# EAGLE board Raincenter_APP-TS_ARM_combined_EUROPLATINE (EAGLE 6.6.0)
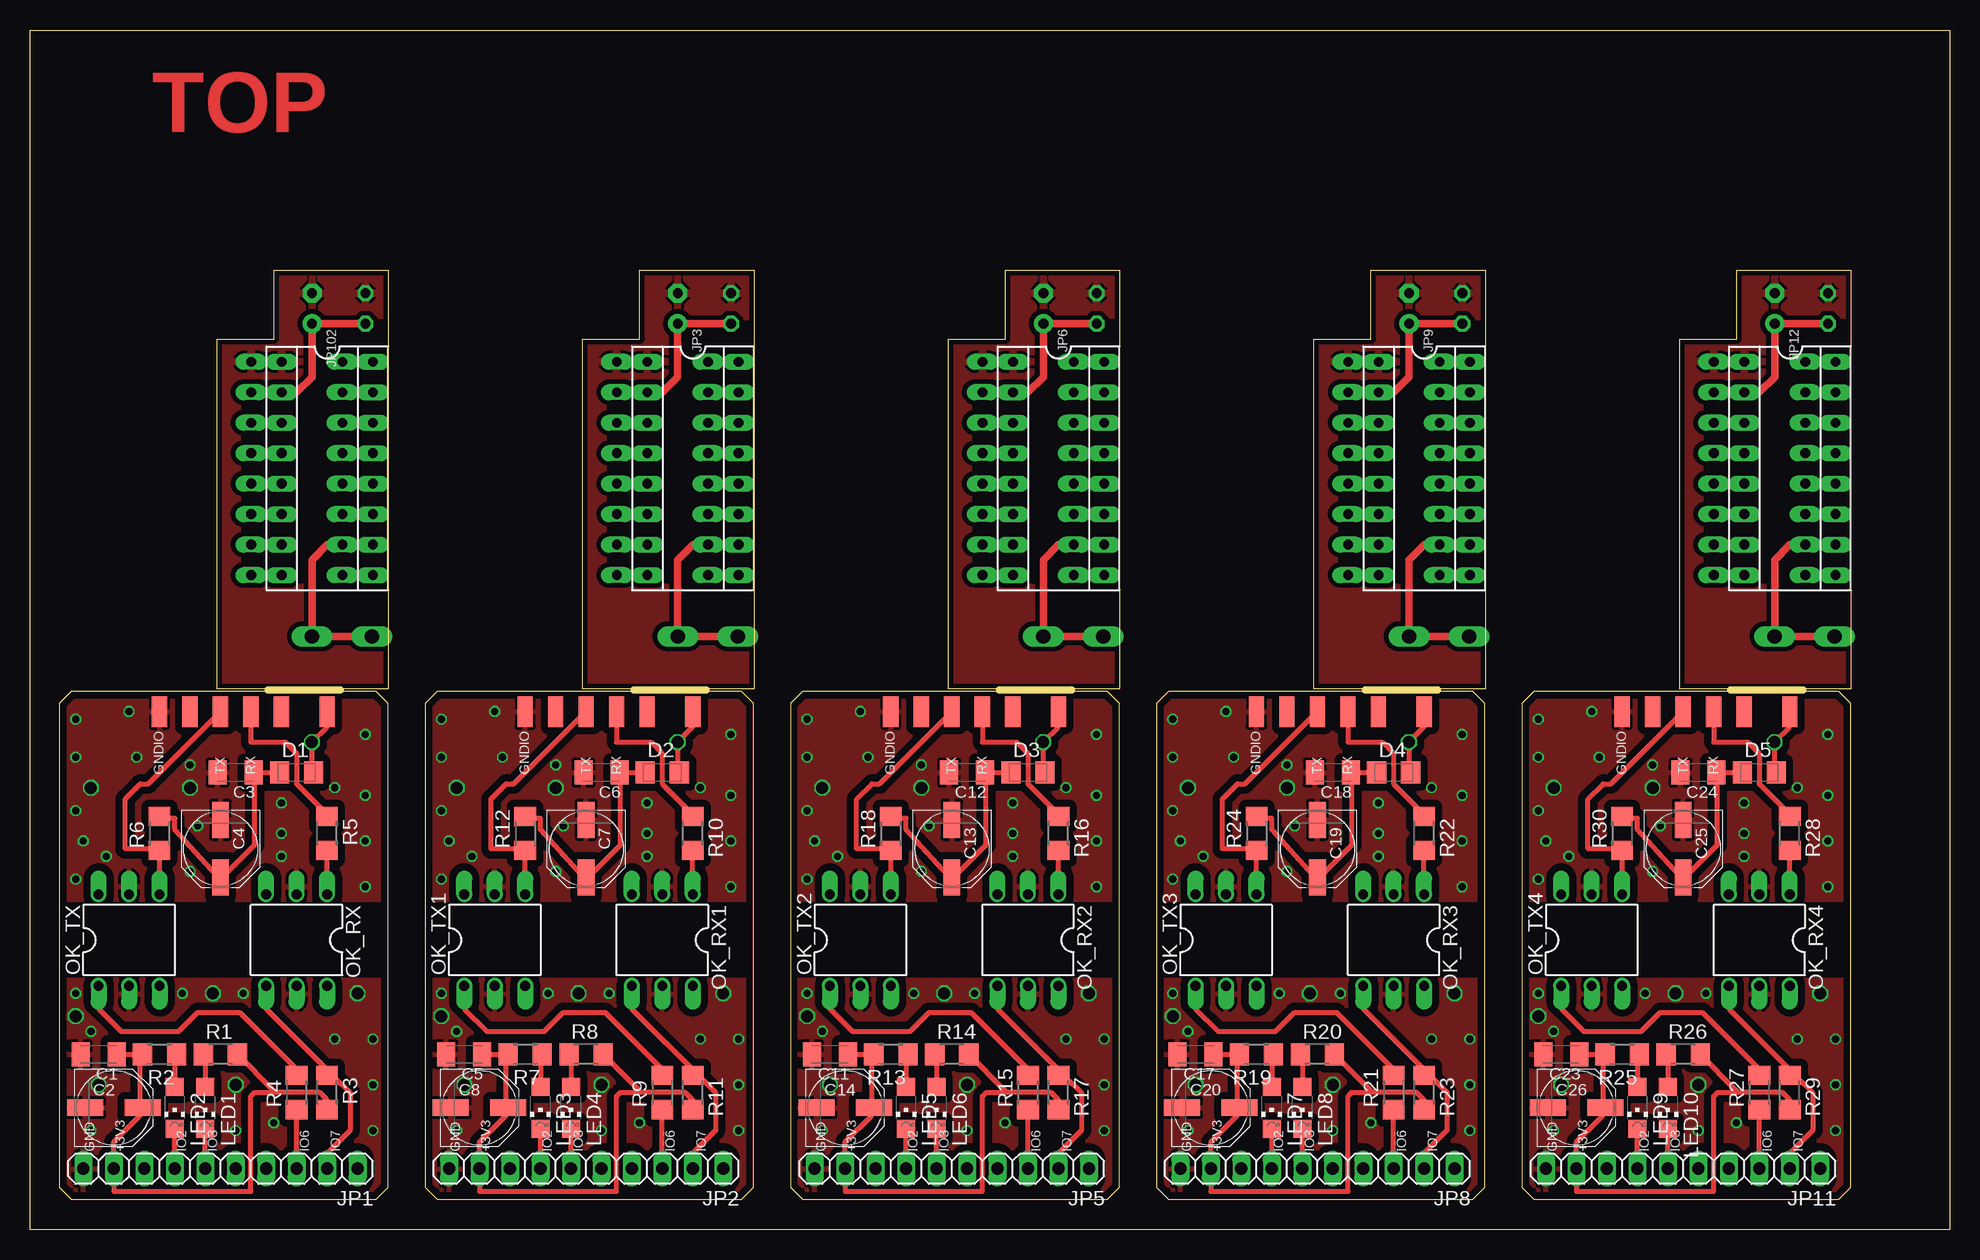
[diagram p0: board, top side]
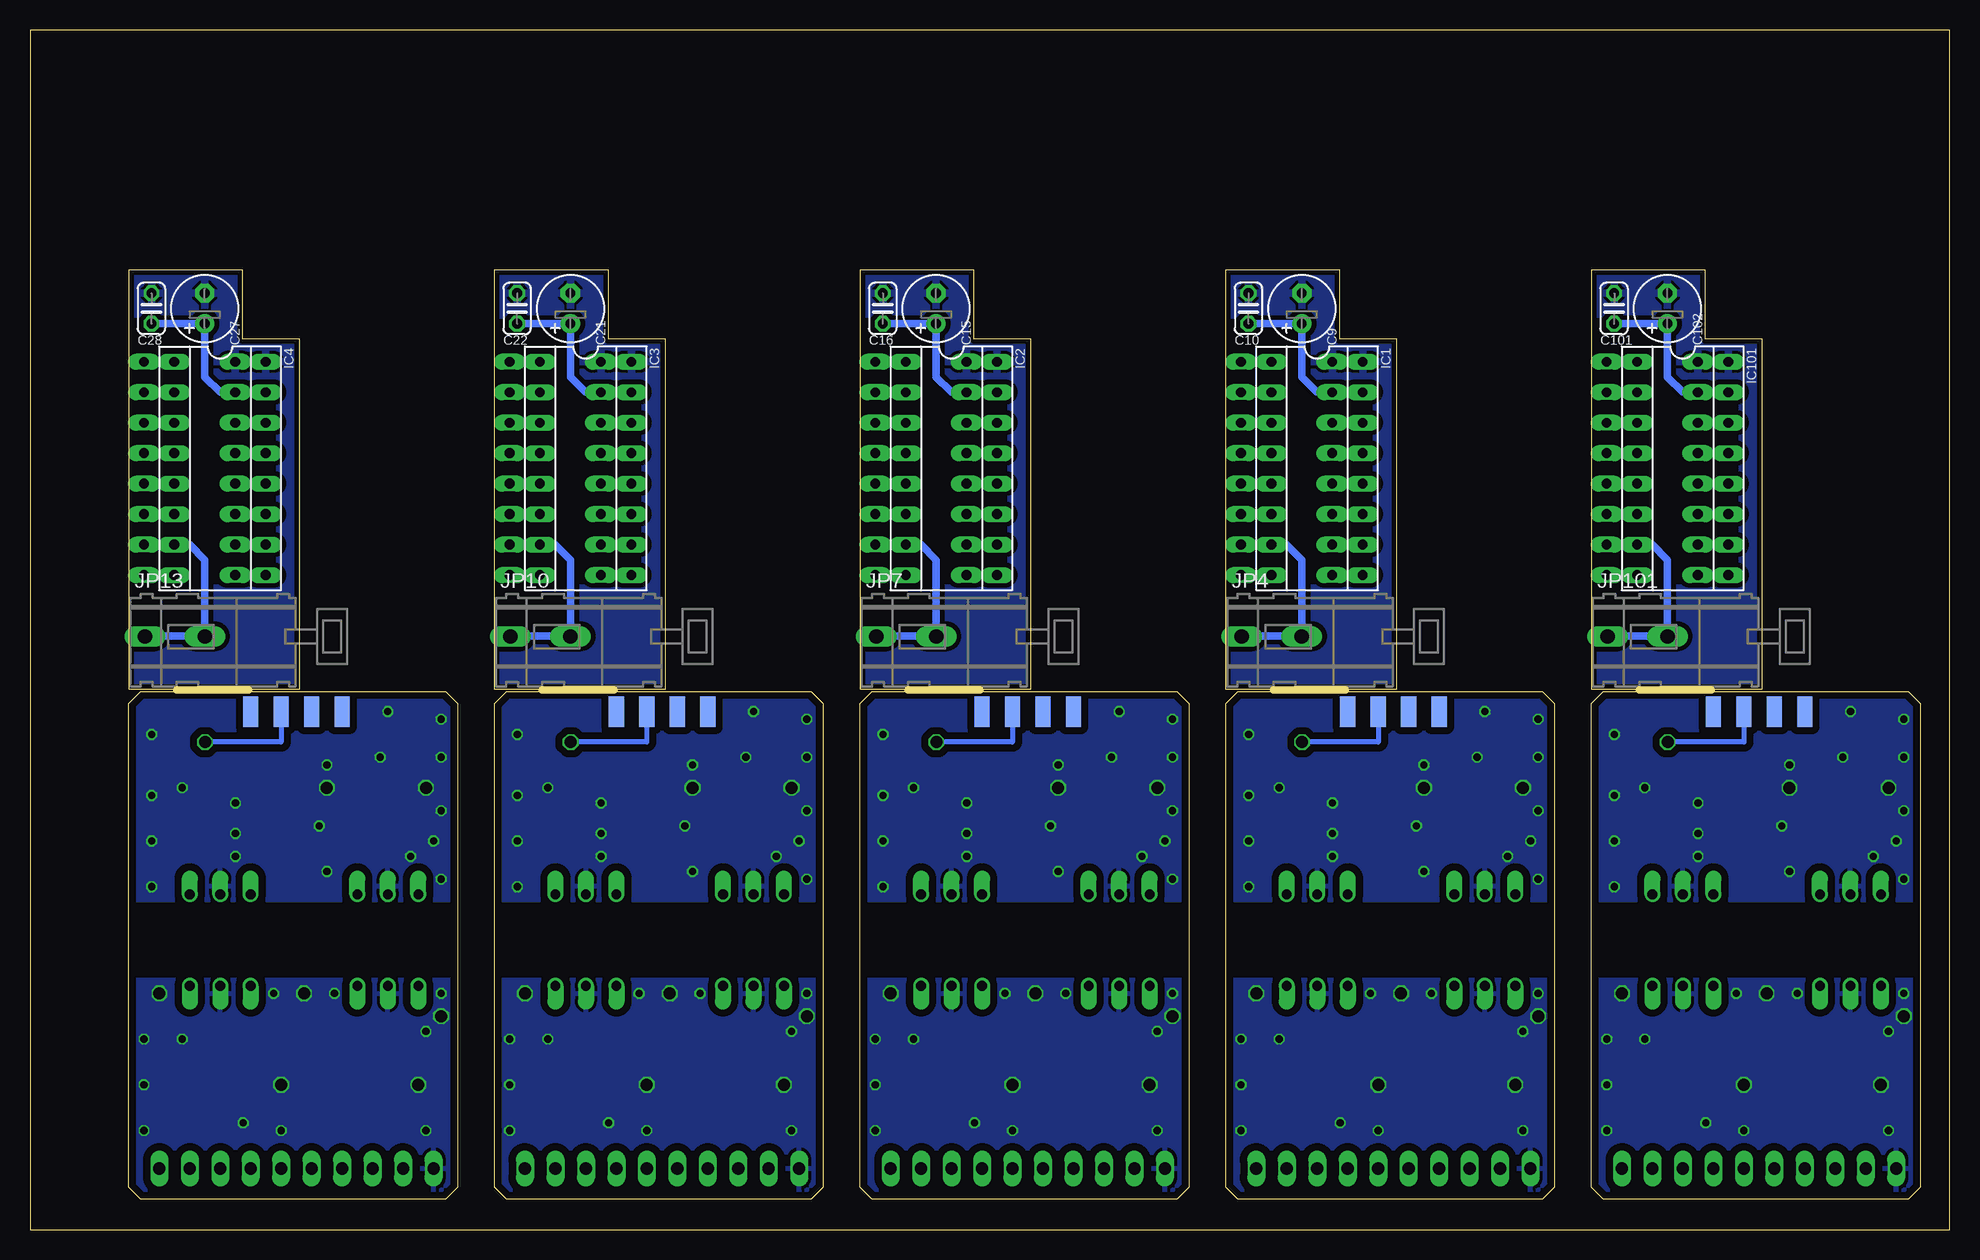
[diagram p1: board, bottom side, seen from below]

Size 160 x 100 mm. Coordinates in mm from the lower left corner, seen from the top.
Outline: 0,0 0,100 160,100 160,0 0,0
Outline: 28.84,2.54 29.84,3.54 29.84,43.84 28.84,44.84 3.44,44.84 2.44,43.84 2.44,3.54 3.44,2.54 28.84,2.54
Outline: 29.86,79.96 29.86,45.05 15.59,45.05 15.59,74.25 20.34,74.25 20.34,79.96 29.86,79.96
Outline: 59.33,2.54 60.33,3.54 60.33,43.84 59.33,44.84 33.92,44.84 32.92,43.84 32.92,3.54 33.92,2.54 59.33,2.54
Outline: 60.34,79.96 60.34,45.05 46.06,45.05 46.06,74.25 50.81,74.25 50.81,79.96 60.34,79.96
Outline: 89.81,2.54 90.81,3.54 90.81,43.84 89.81,44.84 64.41,44.84 63.41,43.84 63.41,3.54 64.41,2.54 89.81,2.54
Outline: 90.82,79.96 90.82,45.05 76.55,45.05 76.55,74.25 81.3,74.25 81.3,79.96 90.82,79.96
Outline: 120.28,2.54 121.28,3.54 121.28,43.84 120.28,44.84 94.89,44.84 93.89,43.84 93.89,3.54 94.89,2.54 120.28,2.54
Outline: 121.3,79.96 121.3,45.05 107.03,45.05 107.03,74.25 111.78,74.25 111.78,79.96 121.3,79.96
Outline: 150.76,2.54 151.76,3.54 151.76,43.84 150.76,44.84 125.36,44.84 124.36,43.84 124.36,3.54 125.36,2.54 150.76,2.54
Outline: 151.78,79.96 151.78,45.05 137.5,45.05 137.5,74.25 142.25,74.25 142.25,79.96 151.78,79.96
Copper layers (1*16): Top 0.035mm / dielectric 1.5mm / Bottom 0.035mm
Design rules "aisler_2_layer *": minimum track width 0.1mm, minimum drill 0.2mm, track to track 0.1mm, track to pad 0.1mm, pad to pad 0.1mm, via to via 0.1mm, smd to smd 0.1mm, copper to edge 0.2mm, drill to drill 0.21mm, minimum pad ring 0.25mm, minimum via ring 0.15mm, stop-mask expansion 0mil, vias tented up to drill 0mil, thermal gap 10mil
Net classes: 0 default: width 0.406 mm; 2 VCC: width 0.61 mm
tRestrict: area 1.9,21.6 to 31.1,26.7; area 32.4,21.6 to 61.6,26.7; area 62.9,21.6 to 92.1,26.7; area 93.3,21.6 to 122.6,26.7; area 123.8,21.6 to 153,26.7
bRestrict: area 1.9,21.6 to 31.1,26.7; area 32.4,21.6 to 61.6,26.7; area 62.9,21.6 to 92.1,26.7; area 93.3,21.6 to 122.6,26.7; area 123.8,21.6 to 153,26.7
Milling: 5 lines

## Footprints (pad centres in the part's own frame; a part is rotated, then mirrored left to right if it is on the bottom)
C1206K = smd 1.5 x 2: 1 -1.5,0; 2 1.5,0
PANASONIC_D = smd 3 x 1.4: + 2.4,0; - -2.4,0
E2,5-6 = drill 0.813 pad 1.6: + -1.27,0 | drill 0.813 pad 1.6 octagon: - 1.27,0
C025-024X044 = drill 0.813 octagon: 1 -1.27,0; 2 1.27,0
1206 = smd 1.6 x 1.803: ANODE 1.422,0; KATHODE -1.422,0
SOCKET-16 = drill 0.813 long: 1 -8.89,-3.81; 2 -6.35,-3.81; 3 -3.81,-3.81; 4 -1.27,-3.81; 5 1.27,-3.81; 6 3.81,-3.81; 7 6.35,-3.81; 8 8.89,-3.81; 9 8.89,3.81; 10 6.35,3.81; 11 3.81,3.81; 12 1.27,3.81; 13 -1.27,3.81; 14 -3.81,3.81; 15 -6.35,3.81; 16 -8.89,3.81
1X10 = drill 1.016 long: 1 -11.43,0; 2 -8.89,0; 3 -6.35,0; 4 -3.81,0; 5 -1.27,0; 6 1.27,0; 7 3.81,0; 8 6.35,0; 9 8.89,0; 10 11.43,0
255-401-5 = drill 1.2 long: A1 -2.5,0; B1 -2.5,-5
CHIPLED_1206 = smd 1.5 x 1.5: A 0,-1.75; C 0,1.75
DIL06 = drill 0.813 offset: 1 -2.54,-3.81; 2 0,-3.81; 3 2.54,-3.81; 4 2.54,3.81; 5 0,3.81; 6 -2.54,3.81
SMD1,27-2,54 = smd 1.27 x 2.54: 1 0,0
R1206 = smd 1.6 x 1.803: 1 -1.422,0; 2 1.422,0

## Placement (x,y rotation side)
C1  100nF  [C1206K]  5.71,14.61 180 top
C2  100µF 25V  [PANASONIC_D]  6.99,10.16 0 top
C3  100nF  [C1206K]  17.14,38.1 180 top
C4  100µF 25V  [PANASONIC_D]  15.88,31.75 270 top
C5  100nF  [C1206K]  36.2,14.61 180 top
C6  100nF  [C1206K]  47.62,38.1 180 top
C7  100µF 25V  [PANASONIC_D]  46.35,31.75 270 top
C8  100µF 25V  [PANASONIC_D]  37.47,10.16 0 top
C9  1µF/100V  [E2,5-6]  53.99,76.78 90 bottom
C10  100nF/50V  [C025-024X044]  58.44,76.78 90 bottom
C11  100nF  [C1206K]  66.67,14.61 180 top
C12  100nF  [C1206K]  78.11,38.1 180 top
C13  100µF 25V  [PANASONIC_D]  76.83,31.75 270 top
C14  100µF 25V  [PANASONIC_D]  67.94,10.16 0 top
C15  1µF/100V  [E2,5-6]  84.47,76.78 90 bottom
C16  100nF/50V  [C025-024X044]  88.92,76.78 90 bottom
C17  100nF  [C1206K]  97.16,14.61 180 top
C18  100nF  [C1206K]  108.58,38.1 180 top
C19  100µF 25V  [PANASONIC_D]  107.31,31.75 270 top
C20  100µF 25V  [PANASONIC_D]  98.42,10.16 0 top
C21  1µF/100V  [E2,5-6]  114.95,76.78 90 bottom
C22  100nF/50V  [C025-024X044]  119.39,76.78 90 bottom
C23  100nF  [C1206K]  127.64,14.61 180 top
C24  100nF  [C1206K]  139.06,38.1 180 top
C25  100µF 25V  [PANASONIC_D]  137.79,31.75 270 top
C26  100µF 25V  [PANASONIC_D]  128.91,10.16 0 top
C27  1µF/100V  [E2,5-6]  145.43,76.78 90 bottom
C28  100nF/50V  [C025-024X044]  149.88,76.78 90 bottom
C101  100nF/50V  [C025-024X044]  27.95,76.78 90 bottom
C102  1µF/100V  [E2,5-6]  23.51,76.78 90 bottom
D1  TS4148  [1206]  22.23,38.1 0 top
D2  TS4148  [1206]  52.7,38.1 0 top
D3  TS4148  [1206]  83.19,38.1 0 top
D4  TS4148  [1206]  113.67,38.1 0 top
D5  TS4148  [1206]  144.15,38.1 0 top
IC1  MAX232ECSE  [SOCKET-16]  52.72,63.45 270 bottom
IC2  MAX232ECSE  [SOCKET-16]  83.2,63.45 270 bottom
IC3  MAX232ECSE  [SOCKET-16]  113.68,63.45 270 bottom
IC4  MAX232ECSE  [SOCKET-16]  144.16,63.45 270 bottom
IC101  MAX232ECSE  [SOCKET-16]  22.24,63.45 270 bottom
JP1  TS_ARM  [1X10]  15.88,5.08 180 top
JP2  TS_ARM  [1X10]  46.35,5.08 180 top
JP3  Raincenter  [SOCKET-16]  55.26,63.45 270 top
JP4  256-101  [255-401-5]  53.99,46.94 270 bottom
JP5  TS_ARM  [1X10]  76.83,5.08 180 top
JP6  Raincenter  [SOCKET-16]  85.74,63.45 270 top
JP7  256-101  [255-401-5]  84.47,46.94 270 bottom
JP8  TS_ARM  [1X10]  107.31,5.08 180 top
JP9  Raincenter  [SOCKET-16]  116.22,63.45 270 top
JP10  256-101  [255-401-5]  114.95,46.94 270 bottom
JP11  TS_ARM  [1X10]  137.79,5.08 180 top
JP12  Raincenter  [SOCKET-16]  146.7,63.45 270 top
JP13  256-101  [255-401-5]  145.43,46.94 270 bottom
JP101  256-101  [255-401-5]  23.51,46.94 270 bottom
JP102  Raincenter  [SOCKET-16]  24.78,63.45 270 top
LED1  green  [CHIPLED_1206]  14.61,10.16 180 top
LED2  yellow  [CHIPLED_1206]  12.06,10.16 180 top
LED3  yellow  [CHIPLED_1206]  42.55,10.16 180 top
LED4  green  [CHIPLED_1206]  45.09,10.16 180 top
LED5  yellow  [CHIPLED_1206]  73.03,10.16 180 top
LED6  green  [CHIPLED_1206]  75.56,10.16 180 top
LED7  yellow  [CHIPLED_1206]  103.5,10.16 180 top
LED8  green  [CHIPLED_1206]  106.05,10.16 180 top
LED9  yellow  [CHIPLED_1206]  133.99,10.16 180 top
LED10  green  [CHIPLED_1206]  136.53,10.16 180 top
OK_RX  4N35  [DIL06]  22.23,24.13 180 top
OK_RX1  4N35  [DIL06]  52.7,24.13 180 top
OK_RX2  4N35  [DIL06]  83.19,24.13 180 top
OK_RX3  4N35  [DIL06]  113.67,24.13 180 top
OK_RX4  4N35  [DIL06]  144.15,24.13 180 top
OK_TX  4N35  [DIL06]  8.26,24.13 0 top
OK_TX1  4N35  [DIL06]  38.73,24.13 0 top
OK_TX2  4N35  [DIL06]  69.22,24.13 0 top
OK_TX3  4N35  [DIL06]  99.69,24.13 0 top
OK_TX4  4N35  [DIL06]  130.18,24.13 0 top
PAD1  [SMD1,27-2,54]  20.95,43.18 180 top
PAD2  RX  [SMD1,27-2,54]  18.41,43.18 180 top
PAD3  TX  [SMD1,27-2,54]  15.88,43.18 180 top
PAD4  [SMD1,27-2,54]  13.34,43.18 180 top
PAD5  GNDIO  [SMD1,27-2,54]  10.79,43.18 180 top
PAD6  [SMD1,27-2,54]  19.68,43.18 0 bottom
PAD7  RTS  [SMD1,27-2,54]  17.14,43.18 0 bottom
PAD8  [SMD1,27-2,54]  14.61,43.18 0 bottom
PAD9  [SMD1,27-2,54]  12.06,43.18 0 bottom
PAD10  RTS  [SMD1,27-2,54]  24.77,43.18 180 top
PAD11  [SMD1,27-2,54]  51.44,43.18 180 top
PAD12  RX  [SMD1,27-2,54]  48.9,43.18 180 top
PAD13  TX  [SMD1,27-2,54]  46.35,43.18 180 top
PAD14  [SMD1,27-2,54]  43.81,43.18 180 top
PAD15  GNDIO  [SMD1,27-2,54]  41.27,43.18 180 top
PAD16  [SMD1,27-2,54]  50.16,43.18 0 bottom
PAD17  RTS  [SMD1,27-2,54]  47.62,43.18 0 bottom
PAD18  [SMD1,27-2,54]  45.09,43.18 0 bottom
PAD19  [SMD1,27-2,54]  42.55,43.18 0 bottom
PAD20  RTS  [SMD1,27-2,54]  55.24,43.18 180 top
PAD21  [SMD1,27-2,54]  81.92,43.18 180 top
PAD22  RX  [SMD1,27-2,54]  79.38,43.18 180 top
PAD23  TX  [SMD1,27-2,54]  76.83,43.18 180 top
PAD24  [SMD1,27-2,54]  74.3,43.18 180 top
PAD25  GNDIO  [SMD1,27-2,54]  71.75,43.18 180 top
PAD26  [SMD1,27-2,54]  80.64,43.18 0 bottom
PAD27  RTS  [SMD1,27-2,54]  78.11,43.18 0 bottom
PAD28  [SMD1,27-2,54]  75.56,43.18 0 bottom
PAD29  [SMD1,27-2,54]  73.03,43.18 0 bottom
PAD30  RTS  [SMD1,27-2,54]  85.72,43.18 180 top
PAD31  [SMD1,27-2,54]  112.39,43.18 180 top
PAD32  RX  [SMD1,27-2,54]  109.86,43.18 180 top
PAD33  TX  [SMD1,27-2,54]  107.31,43.18 180 top
PAD34  [SMD1,27-2,54]  104.78,43.18 180 top
PAD35  GNDIO  [SMD1,27-2,54]  102.23,43.18 180 top
PAD36  [SMD1,27-2,54]  111.12,43.18 0 bottom
PAD37  RTS  [SMD1,27-2,54]  108.58,43.18 0 bottom
PAD38  [SMD1,27-2,54]  106.05,43.18 0 bottom
PAD39  [SMD1,27-2,54]  103.5,43.18 0 bottom
PAD40  RTS  [SMD1,27-2,54]  116.2,43.18 180 top
PAD41  [SMD1,27-2,54]  142.88,43.18 180 top
PAD42  RX  [SMD1,27-2,54]  140.34,43.18 180 top
PAD43  TX  [SMD1,27-2,54]  137.79,43.18 180 top
PAD44  [SMD1,27-2,54]  135.25,43.18 180 top
PAD45  GNDIO  [SMD1,27-2,54]  132.72,43.18 180 top
PAD46  [SMD1,27-2,54]  141.6,43.18 0 bottom
PAD47  RTS  [SMD1,27-2,54]  139.06,43.18 0 bottom
PAD48  [SMD1,27-2,54]  136.53,43.18 0 bottom
PAD49  [SMD1,27-2,54]  133.99,43.18 0 bottom
PAD50  RTS  [SMD1,27-2,54]  146.69,43.18 180 top
R1  1K0  [R1206]  15.88,14.61 0 top
R2  1K0  [R1206]  10.79,14.61 180 top
R3  4K7  [R1206]  24.77,11.43 270 top
R4  470R0  [R1206]  22.23,11.43 90 top
R5  470R0  [R1206]  24.77,33.02 270 top
R6  2K2  [R1206]  10.79,33.02 90 top
R7  1K0  [R1206]  41.27,14.61 180 top
R8  1K0  [R1206]  46.35,14.61 0 top
R9  470R0  [R1206]  52.7,11.43 90 top
R10  470R0  [R1206]  55.24,33.02 270 top
R11  4K7  [R1206]  55.24,11.43 270 top
R12  2K2  [R1206]  41.27,33.02 90 top
R13  1K0  [R1206]  71.75,14.61 180 top
R14  1K0  [R1206]  76.83,14.61 0 top
R15  470R0  [R1206]  83.19,11.43 90 top
R16  470R0  [R1206]  85.72,33.02 270 top
R17  4K7  [R1206]  85.72,11.43 270 top
R18  2K2  [R1206]  71.75,33.02 90 top
R19  1K0  [R1206]  102.23,14.61 180 top
R20  1K0  [R1206]  107.31,14.61 0 top
R21  470R0  [R1206]  113.67,11.43 90 top
R22  470R0  [R1206]  116.2,33.02 270 top
R23  4K7  [R1206]  116.2,11.43 270 top
R24  2K2  [R1206]  102.23,33.02 90 top
R25  1K0  [R1206]  132.72,14.61 180 top
R26  1K0  [R1206]  137.79,14.61 0 top
R27  470R0  [R1206]  144.15,11.43 90 top
R28  470R0  [R1206]  146.69,33.02 270 top
R29  4K7  [R1206]  146.69,11.43 270 top
R30  2K2  [R1206]  132.72,33.02 90 top

## Library data of the parts
C1 C3 C5 C6 C11 C12 C17 C18 C23 C24 = rcl
C2 C4 C7 C8 C13 C14 C19 C20 C25 C26 = rcl; OC_REICHELT: VF 100/25 P-D8
C9 C15 C21 C27 C102 = rcl; REICHELT: RAD 105 1,0/100
C10 C16 C22 C28 C101 = rcl; MN: Murata; REICHELT: X7R-2,5 100N
D1-D5 = kubi
IC1-IC4 IC101 = ic-package; REICHELT: GS 16P
JP1 JP2 JP5 JP8 JP11 = pinhead
JP3 JP6 JP9 JP12 JP102 = ic-package; MF: ASSMANN; MPN: AR-16-ST/T; REICHELT: AR 16
JP4 JP7 JP10 JP13 JP101 = Klemmen; CONRAD: 1x730366 + 1x730378; MN: WAGO; MPN: 1x 256-101 + 1x 256-100
LED1 LED4 LED6 LED8 LED10 = led; REICHELT: SMD-LED 1206 GN
LED2 LED3 LED5 LED7 LED9 = led; REICHELT: SMD-LED 1206 GE
OK_RX OK_RX1-OK_RX4 OK_TX OK_TX1-OK_TX4 = optocoupler; MF: FAIRCHILD SEMICONDUCTOR; MPN: 4N35; OC_FARNELL: 1328375; OC_NEWARK: 72K9946
PAD1-PAD50 = wirepad
R1 R2 R7 R8 R13 R14 R19 R20 R25 R26 = rcl; REICHELT: RND 1206 1 1,0K
R3 R11 R17 R23 R29 = rcl; REICHELT: RND 1206 1 4,7K
R4 R5 R9 R10 R15 R16 R21 R22 R27 R28 = rcl; REICHELT: RND 1206 1 470
R6 R12 R18 R24 R30 = rcl; REICHELT: RND 1206 1 3,9K

## Nets
+3V1: C5.1 C8.+ JP2.9 R7.2 R8.2 R11.2
+3V2: C11.1 C14.+ JP5.9 R13.2 R14.2 R17.2
+3V3: C1.1 C2.+ JP1.9 R1.2 R2.2 R3.2
+3V4: C17.1 C20.+ JP8.9 R19.2 R20.2 R23.2
+3V5: C23.1 C26.+ JP11.9 R25.2 R26.2 R29.2
+5V: C101.1 C102.+ IC101.15 JP102.2
+5V1: C9.+ C10.1 IC1.15 JP3.2
+5V2: C15.+ C16.1 IC2.15 JP6.2
+5V3: C21.+ C22.1 IC3.15 JP9.2
+5V4: C27.+ C28.1 IC4.15 JP12.2
GND: C1.2 C2.- JP1.10 OK_RX.5 OK_TX.2
GND1: C5.2 C8.- JP2.10 OK_RX1.5 OK_TX1.2
GND2: C11.2 C14.- JP5.10 OK_RX2.5 OK_TX2.2
GND3: C17.2 C20.- JP8.10 OK_RX3.5 OK_TX3.2
GND4: C23.2 C26.- JP11.10 OK_RX4.5 OK_TX4.2
GNDINT: C101.2 C102.- IC101.16 JP102.1
GNDINT1: C9.- C10.2 IC1.16 JP3.1
GNDINT2: C15.- C16.2 IC2.16 JP6.1
GNDINT3: C21.- C22.2 IC3.16 JP9.1
GNDINT4: C27.- C28.2 IC4.16 JP12.1
GNDIO: C3.2 C4.- OK_RX.2 OK_TX.5 PAD5.1
GNDIO1: C6.2 C7.- OK_RX1.2 OK_TX1.5 PAD15.1
GNDIO2: C12.2 C13.- OK_RX2.2 OK_TX2.5 PAD25.1
GNDIO3: C18.2 C19.- OK_RX3.2 OK_TX3.5 PAD35.1
GNDIO4: C24.2 C25.- OK_RX4.2 OK_TX4.5 PAD45.1
IO1: JP2.7 LED3.C
IO2: JP1.7 LED2.C
IO3: JP1.6 LED1.C
IO4: JP2.6 LED4.C
IO5: JP2.3 R9.1
IO6: JP1.3 R4.1
IO7: JP1.2 OK_RX.4 R3.1
IO8: JP2.2 OK_RX1.4 R11.1
IO9: JP5.7 LED5.C
IO10: JP5.6 LED6.C
IO11: JP5.3 R15.1
IO12: JP5.2 OK_RX2.4 R17.1
IO13: JP8.7 LED7.C
IO14: JP8.6 LED8.C
IO15: JP8.3 R21.1
IO16: JP8.2 OK_RX3.4 R23.1
IO17: JP11.7 LED9.C
IO18: JP11.6 LED10.C
IO19: JP11.3 R27.1
IO20: JP11.2 OK_RX4.4 R29.1
N$1: LED3.A R7.1
N$2: LED4.A R8.1
N$3: OK_RX1.1 R10.2
N$4: OK_TX1.1 R9.2
N$5: LED2.A R2.1
N$6: LED5.A R13.1
N$7: LED6.A R14.1
N$8: OK_RX.1 R5.2
N$9: OK_RX2.1 R16.2
N$10: OK_TX.1 R4.2
N$11: LED1.A R1.1
N$12: OK_TX2.1 R15.2
N$13: LED7.A R19.1
N$14: LED8.A R20.1
N$15: OK_RX3.1 R22.2
N$16: OK_TX3.1 R21.2
N$17: LED9.A R25.1
N$18: LED10.A R26.1
N$19: OK_RX4.1 R28.2
N$20: OK_TX4.1 R27.2
P1: IC101.1 JP102.16
P2: IC101.2 JP102.15
P3: IC101.3 JP102.14
P4: IC101.4 JP102.13
P5: IC101.5 JP102.12
P6: IC101.6 JP102.11
P7: IC1.1 JP3.16
P7_RTS: IC101.7 JP101.A1 JP101.B1 JP102.10
P7_RTS1: IC1.7 JP3.10 JP4.A1 JP4.B1
P7_RTS2: IC2.7 JP6.10 JP7.A1 JP7.B1
P7_RTS3: IC3.7 JP9.10 JP10.A1 JP10.B1
P7_RTS4: IC4.7 JP12.10 JP13.A1 JP13.B1
P8: IC101.8 JP102.9
P9: IC101.9 JP102.8
P10: IC101.10 JP102.7
P11: IC101.11 JP102.6
P12: IC101.12 JP102.5
P13: IC101.13 JP102.4
P14: IC101.14 JP102.3
P15: IC1.2 JP3.15
P16: IC1.3 JP3.14
P17: IC1.4 JP3.13
P18: IC1.5 JP3.12
P19: IC1.6 JP3.11
P20: IC1.8 JP3.9
P21: IC1.9 JP3.8
P22: IC1.10 JP3.7
P23: IC1.11 JP3.6
P24: IC1.12 JP3.5
P25: IC1.13 JP3.4
P26: IC1.14 JP3.3
P27: IC2.1 JP6.16
P28: IC2.2 JP6.15
P29: IC2.3 JP6.14
P30: IC2.4 JP6.13
P31: IC2.5 JP6.12
P32: IC2.6 JP6.11
P33: IC2.8 JP6.9
P34: IC2.9 JP6.8
P35: IC2.10 JP6.7
P36: IC2.11 JP6.6
P37: IC2.12 JP6.5
P38: IC2.13 JP6.4
P39: IC2.14 JP6.3
P40: IC3.1 JP9.16
P41: IC3.2 JP9.15
P42: IC3.3 JP9.14
P43: IC3.4 JP9.13
P44: IC3.5 JP9.12
P45: IC3.6 JP9.11
P46: IC3.8 JP9.9
P47: IC3.9 JP9.8
P48: IC3.10 JP9.7
P49: IC3.11 JP9.6
P50: IC3.12 JP9.5
P51: IC3.13 JP9.4
P52: IC3.14 JP9.3
P53: IC4.1 JP12.16
P54: IC4.2 JP12.15
P55: IC4.3 JP12.14
P56: IC4.4 JP12.13
P57: IC4.5 JP12.12
P58: IC4.6 JP12.11
P59: IC4.8 JP12.9
P60: IC4.9 JP12.8
P61: IC4.10 JP12.7
P62: IC4.11 JP12.6
P63: IC4.12 JP12.5
P64: IC4.13 JP12.4
P65: IC4.14 JP12.3
RC_RTS: D1.ANODE PAD7.1 PAD10.1
RC_RTS1: D2.ANODE PAD17.1 PAD20.1
RC_RTS2: D3.ANODE PAD27.1 PAD30.1
RC_RTS3: D4.ANODE PAD37.1 PAD40.1
RC_RTS4: D5.ANODE PAD47.1 PAD50.1
RC_RX: PAD2.1 R5.1
RC_RX1: PAD12.1 R10.1
RC_RX2: PAD22.1 R16.1
RC_RX3: PAD32.1 R22.1
RC_RX4: PAD42.1 R28.1
RX_TX: OK_TX.4 PAD3.1 R6.1
RX_TX1: OK_TX1.4 PAD13.1 R12.1
RX_TX2: OK_TX2.4 PAD23.1 R18.1
RX_TX3: OK_TX3.4 PAD33.1 R24.1
RX_TX4: OK_TX4.4 PAD43.1 R30.1
V+: C3.1 C4.+ D1.KATHODE R6.2
V+1: C6.1 C7.+ D2.KATHODE R12.2
V+2: C12.1 C13.+ D3.KATHODE R18.2
V+3: C18.1 C19.+ D4.KATHODE R24.2
V+4: C24.1 C25.+ D5.KATHODE R30.2

## Tracks (layer width: path | path; a pad name or v marks a point on that pad's centre or on a via)
+3V1
  Top 0.406: 47.94,15.24 R8.2 50.8,11.58 50.8,11.43 | C5.1 39.69,14.61 | 39.69,10.16 39.69,14.61 | 39.69,14.61 R7.2 | 39.69,10.16 39.05,10.16 | 39.69,10.16 C8.+ 39.69,9.98 39.69,9.53 37.47,7.3 JP2.9 37.47,3.17 48.9,3.17 48.9,11.11 49.21,11.43 50.8,11.43 | R11.2 55.24,10.79 54.61,11.43 50.8,11.43
+3V2
  Top 0.406: 78.42,15.24 R14.2 81.28,11.58 81.28,11.43 | C11.1 70.17,14.61 | 70.17,10.16 70.17,14.61 | 70.17,14.61 R13.2 | 70.17,10.16 69.53,10.16 | 70.17,10.16 C14.+ 70.17,9.98 70.17,9.53 67.94,7.3 JP5.9 67.94,3.17 79.38,3.17 79.38,11.11 79.69,11.43 81.28,11.43 | R17.2 85.72,10.79 85.09,11.43 81.28,11.43
+3V3
  Top 0.406: 17.46,15.24 R1.2 20.32,11.58 20.32,11.43 | C1.1 9.21,14.61 | 9.21,10.16 9.21,14.61 | 9.21,14.61 R2.2 | 9.21,10.16 8.57,10.16 | 9.21,10.16 C2.+ 9.21,9.98 9.21,9.53 6.99,7.3 JP1.9 6.99,3.17 18.41,3.17 18.41,11.11 18.73,11.43 20.32,11.43 | R3.2 24.77,10.79 24.13,11.43 20.32,11.43
+3V4
  Top 0.406: 108.9,15.24 R20.2 111.76,11.58 111.76,11.43 | C17.1 100.65,14.61 | 100.65,10.16 100.65,14.61 | 100.65,14.61 R19.2 | 100.65,10.16 100.01,10.16 | 100.65,10.16 C20.+ 100.65,9.98 100.65,9.53 98.42,7.3 JP8.9 98.42,3.17 109.86,3.17 109.86,11.11 110.17,11.43 111.76,11.43 | R23.2 116.2,10.79 115.57,11.43 111.76,11.43
+3V5
  Top 0.406: 139.38,15.24 R26.2 142.24,11.58 142.24,11.43 | C23.1 131.13,14.61 | 131.13,10.16 131.13,14.61 | 131.13,14.61 R25.2 | 131.13,10.16 130.49,10.16 | 131.13,10.16 C26.+ 131.13,9.98 131.13,9.53 128.91,7.3 JP11.9 128.91,3.17 140.34,3.17 140.34,11.11 140.65,11.43 142.24,11.43 | R29.2 146.69,10.79 146.05,11.43 142.24,11.43
+5V
  Top 0.61: IC101.15 JP102.2 22.24,69.8 23.51,71.07 C102.+ C101.1
  Bottom 0.61: C101.1 C102.+ 23.51,71.07 22.24,69.8 JP102.2 IC101.15
+5V1
  Top 0.61: IC1.15 JP3.2 52.72,69.8 53.99,71.07 C9.+ C10.1
  Bottom 0.61: C10.1 C9.+ 53.99,71.07 52.72,69.8 JP3.2 IC1.15
+5V2
  Top 0.61: IC2.15 JP6.2 83.2,69.8 84.47,71.07 C15.+ C16.1
  Bottom 0.61: C16.1 C15.+ 84.47,71.07 83.2,69.8 JP6.2 IC2.15
+5V3
  Top 0.61: IC3.15 JP9.2 113.68,69.8 114.95,71.07 C21.+ C22.1
  Bottom 0.61: C22.1 C21.+ 114.95,71.07 113.68,69.8 JP9.2 IC3.15
+5V4
  Top 0.61: IC4.15 JP12.2 144.16,69.8 145.43,71.07 C27.+ C28.1
  Bottom 0.61: C28.1 C27.+ 145.43,71.07 144.16,69.8 JP12.2 IC4.15
GND  (via drill 0.6, 1)
  other vias: 3.81,17.78 15.24,19.68 27.3,19.68 17.14,12.06 5.71,12.06 28.57,8.26 28.57,12.06 28.57,15.88 25.4,15.88 20.32,8.89 17.14,8.26 17.78,19.68 12.7,19.68 5.08,8.26 5.08,16.51 3.81,19.68
  pour Top (isolate 0.61, rank 2): 1.91,2.54 2.06,22.23 29.69,22.23 29.53,2.54
  pour Bottom (isolate 0.61, rank 2): 1.91,2.54 2.06,22.23 29.69,22.23 29.53,2.54
GND1  (via drill 0.6, 1)
  other vias: 34.29,17.78 45.72,19.68 57.78,19.68 47.62,12.06 36.2,12.06 59.05,8.26 59.05,12.06 59.05,15.88 55.88,15.88 50.8,8.89 47.62,8.26 48.26,19.68 43.18,19.68 35.56,8.26 35.56,16.51 34.29,19.68
  pour Top (isolate 0.61, rank 2): 32.38,2.54 32.54,22.23 60.17,22.23 60.01,2.54
  pour Bottom (isolate 0.61, rank 2): 32.38,2.54 32.54,22.23 60.17,22.23 60.01,2.54
GND2  (via drill 0.6, 1)
  other vias: 64.77,17.78 76.2,19.68 88.27,19.68 78.11,12.06 66.67,12.06 89.53,8.26 89.53,12.06 89.53,15.88 86.36,15.88 81.28,8.89 78.11,8.26 78.74,19.68 73.66,19.68 66.04,8.26 66.04,16.51 64.77,19.68
  pour Top (isolate 0.61, rank 2): 62.87,2.54 63.02,22.23 90.65,22.23 90.49,2.54
  pour Bottom (isolate 0.61, rank 2): 62.87,2.54 63.02,22.23 90.65,22.23 90.49,2.54
GND3  (via drill 0.6, 1)
  other vias: 95.25,17.78 106.68,19.68 118.75,19.68 108.58,12.06 97.16,12.06 120.02,8.26 120.02,12.06 120.02,15.88 116.84,15.88 111.76,8.89 108.58,8.26 109.22,19.68 104.14,19.68 96.52,8.26 96.52,16.51 95.25,19.68
  pour Top (isolate 0.61, rank 2): 93.34,2.54 93.5,22.23 121.13,22.23 120.97,2.54
  pour Bottom (isolate 0.61, rank 2): 93.34,2.54 93.5,22.23 121.13,22.23 120.97,2.54
GND4  (via drill 0.6, 1)
  other vias: 125.73,17.78 137.16,19.68 149.22,19.68 139.06,12.06 127.64,12.06 150.5,8.26 150.5,12.06 150.5,15.88 147.32,15.88 142.24,8.89 139.06,8.26 139.7,19.68 134.62,19.68 127,8.26 127,16.51 125.73,19.68
  pour Top (isolate 0.61, rank 2): 123.83,2.54 123.98,22.23 151.61,22.23 151.45,2.54
  pour Bottom (isolate 0.61, rank 2): 123.83,2.54 123.98,22.23 151.61,22.23 151.45,2.54
GNDINT
  pour Top (isolate 0.406): 29.86,79.96 29.86,45.03 15.26,45.03 15.26,74.25 20.34,74.25 20.34,79.96
  pour Bottom (isolate 0.406): 29.86,79.96 29.86,45.03 15.26,45.03 15.26,74.25 20.34,74.25 20.34,79.96
GNDINT1
  pour Top (isolate 0.406): 60.34,79.96 60.34,45.03 45.73,45.03 45.73,74.25 50.81,74.25 50.81,79.96
  pour Bottom (isolate 0.406): 60.34,79.96 60.34,45.03 45.73,45.03 45.73,74.25 50.81,74.25 50.81,79.96
GNDINT2
  pour Top (isolate 0.406): 90.82,79.96 90.82,45.03 76.22,45.03 76.22,74.25 81.3,74.25 81.3,79.96
  pour Bottom (isolate 0.406): 90.82,79.96 90.82,45.03 76.22,45.03 76.22,74.25 81.3,74.25 81.3,79.96
GNDINT3
  pour Top (isolate 0.406): 121.3,79.96 121.3,45.03 106.69,45.03 106.69,74.25 111.78,74.25 111.78,79.96
  pour Bottom (isolate 0.406): 121.3,79.96 121.3,45.03 106.69,45.03 106.69,74.25 111.78,74.25 111.78,79.96
GNDINT4
  pour Top (isolate 0.406): 151.78,79.96 151.78,45.03 137.18,45.03 137.18,74.25 142.25,74.25 142.25,79.96
  pour Bottom (isolate 0.406): 151.78,79.96 151.78,45.03 137.18,45.03 137.18,74.25 142.25,74.25 142.25,79.96
GNDIO  (via drill 0.6, 1)
  other vias: 13.34,36.83 5.08,36.83 4.45,32.38 3.81,29.21 3.81,34.92 3.81,39.37 3.81,42.55 8.26,43.18 8.89,39.37 6.35,31.11 13.34,29.84 13.97,33.66 13.34,38.73 20.95,35.56 20.95,33.02 20.95,31.11 27.94,28.57 27.94,41.27 25.4,36.83 27.94,36.2 27.94,32.38
  pour Top (isolate 0.61, rank 2): 1.91,26.04 2.06,45.09 29.69,45.09 29.53,26.04
  pour Bottom (isolate 0.61, rank 2): 1.91,26.04 2.06,45.09 29.69,45.09 29.53,26.04
GNDIO1  (via drill 0.6, 1)
  other vias: 43.81,36.83 35.56,36.83 34.92,32.38 34.29,29.21 34.29,34.92 34.29,39.37 34.29,42.55 38.73,43.18 39.37,39.37 36.83,31.11 43.81,29.84 44.45,33.66 43.81,38.73 51.44,35.56 51.44,33.02 51.44,31.11 58.42,28.57 58.42,41.27 55.88,36.83 58.42,36.2 58.42,32.38
  pour Top (isolate 0.61, rank 2): 32.38,26.04 32.54,45.09 60.17,45.09 60.01,26.04
  pour Bottom (isolate 0.61, rank 2): 32.38,26.04 32.54,45.09 60.17,45.09 60.01,26.04
GNDIO2  (via drill 0.6, 1)
  other vias: 74.3,36.83 66.04,36.83 65.41,32.38 64.77,29.21 64.77,34.92 64.77,39.37 64.77,42.55 69.22,43.18 69.85,39.37 67.31,31.11 74.3,29.84 74.93,33.66 74.3,38.73 81.92,35.56 81.92,33.02 81.92,31.11 88.9,28.57 88.9,41.27 86.36,36.83 88.9,36.2 88.9,32.38
  pour Top (isolate 0.61, rank 2): 62.87,26.04 63.02,45.09 90.65,45.09 90.49,26.04
  pour Bottom (isolate 0.61, rank 2): 62.87,26.04 63.02,45.09 90.65,45.09 90.49,26.04
GNDIO3  (via drill 0.6, 1)
  other vias: 104.78,36.83 96.52,36.83 95.89,32.38 95.25,29.21 95.25,34.92 95.25,39.37 95.25,42.55 99.69,43.18 100.33,39.37 97.79,31.11 104.78,29.84 105.41,33.66 104.78,38.73 112.39,35.56 112.39,33.02 112.39,31.11 119.38,28.57 119.38,41.27 116.84,36.83 119.38,36.2 119.38,32.38
  pour Top (isolate 0.61, rank 2): 93.34,26.04 93.5,45.09 121.13,45.09 120.97,26.04
  pour Bottom (isolate 0.61, rank 2): 93.34,26.04 93.5,45.09 121.13,45.09 120.97,26.04
GNDIO4  (via drill 0.6, 1)
  other vias: 135.25,36.83 127,36.83 126.36,32.38 125.73,29.21 125.73,34.92 125.73,39.37 125.73,42.55 130.18,43.18 130.81,39.37 128.27,31.11 135.25,29.84 135.89,33.66 135.25,38.73 142.88,35.56 142.88,33.02 142.88,31.11 149.86,28.57 149.86,41.27 147.32,36.83 149.86,36.2 149.86,32.38
  pour Top (isolate 0.61, rank 2): 123.83,26.04 123.98,45.09 151.61,45.09 151.45,26.04
  pour Bottom (isolate 0.61, rank 2): 123.83,26.04 123.98,45.09 151.61,45.09 151.45,26.04
IO1
  Top 0.406: JP2.7 LED3.C
IO2
  Top 0.406: JP1.7 LED2.C
IO3
  Top 0.406: JP1.6 LED1.C
IO4
  Top 0.406: JP2.6 LED4.C
IO5
  Top 0.406: JP2.3 R9.1
IO6
  Top 0.406: JP1.3 R4.1
IO7
  Top 0.406: OK_RX.4 19.68,18.41 25.4,12.7 | JP1.2 24.77,6.35 26.67,8.26 26.67,11.43 25.4,12.7 | 25.4,12.7 24.77,12.7 R3.1
IO8
  Top 0.406: OK_RX1.4 50.16,18.41 55.88,12.7 | JP2.2 55.24,6.35 57.15,8.26 57.15,11.43 55.88,12.7 | 55.88,12.7 55.24,12.7 R11.1
IO9
  Top 0.406: JP5.7 LED5.C
IO10
  Top 0.406: JP5.6 LED6.C
IO11
  Top 0.406: JP5.3 R15.1
IO12
  Top 0.406: OK_RX2.4 80.64,18.41 86.36,12.7 | JP5.2 85.72,6.35 87.63,8.26 87.63,11.43 86.36,12.7 | 86.36,12.7 85.72,12.7 R17.1
IO13
  Top 0.406: JP8.7 LED7.C
IO14
  Top 0.406: JP8.6 LED8.C
IO15
  Top 0.406: JP8.3 R21.1
IO16
  Top 0.406: OK_RX3.4 111.12,18.41 116.84,12.7 | JP8.2 116.2,6.35 118.11,8.26 118.11,11.43 116.84,12.7 | 116.84,12.7 116.2,12.7 R23.1
IO17
  Top 0.406: JP11.7 LED9.C
IO18
  Top 0.406: JP11.6 LED10.C
IO19
  Top 0.406: JP11.3 R27.1
IO20
  Top 0.406: OK_RX4.4 141.6,18.41 147.32,12.7 | JP11.2 146.69,6.35 148.59,8.26 148.59,11.43 147.32,12.7 | 147.32,12.7 146.69,12.7 R29.1
N$1
  Top 0.406: LED3.A 42.55,15.24 R7.1
N$2
  Top 0.406: LED4.A 45.09,15.24 R8.1
N$3
  Top 0.406: OK_RX1.1 R10.2
N$4
  Top 0.406: OK_TX1.1 36.2,18.41 38.1,16.51 42.86,16.51 44.45,18.1 47.94,18.1 52.7,13.34 R9.2
N$5
  Top 0.406: LED2.A 12.06,15.24 R2.1
N$6
  Top 0.406: LED5.A 73.03,15.24 R13.1
N$7
  Top 0.406: LED6.A 75.56,15.24 R14.1
N$8
  Top 0.406: OK_RX.1 R5.2
N$9
  Top 0.406: OK_RX2.1 R16.2
N$10
  Top 0.406: OK_TX.1 5.71,18.41 7.62,16.51 12.38,16.51 13.97,18.1 17.46,18.1 22.23,13.34 R4.2
N$11
  Top 0.406: LED1.A 14.61,15.24 R1.1
N$12
  Top 0.406: OK_TX2.1 66.67,18.41 68.58,16.51 73.34,16.51 74.93,18.1 78.42,18.1 83.19,13.34 R15.2
N$13
  Top 0.406: LED7.A 103.5,15.24 R19.1
N$14
  Top 0.406: LED8.A 106.05,15.24 R20.1
N$15
  Top 0.406: OK_RX3.1 R22.2
N$16
  Top 0.406: OK_TX3.1 97.16,18.41 99.06,16.51 103.82,16.51 105.41,18.1 108.9,18.1 113.67,13.34 R21.2
N$17
  Top 0.406: LED9.A 133.99,15.24 R25.1
N$18
  Top 0.406: LED10.A 136.53,15.24 R26.1
N$19
  Top 0.406: OK_RX4.1 R28.2
N$20
  Top 0.406: OK_TX4.1 127.64,18.41 129.54,16.51 134.3,16.51 135.89,18.1 139.38,18.1 144.15,13.34 R27.2
P1
  Top 0.61: IC101.1 JP102.16
  Bottom 0.61: JP102.16 IC101.1
P2
  Top 0.61: IC101.2 JP102.15
  Bottom 0.61: IC101.2 JP102.15
P3
  Top 0.61: IC101.3 JP102.14
  Bottom 0.61: IC101.3 JP102.14
P4
  Top 0.61: IC101.4 JP102.13
  Bottom 0.61: JP102.13 IC101.4
P5
  Top 0.61: IC101.5 JP102.12
  Bottom 0.61: IC101.5 JP102.12
P6
  Top 0.61: IC101.6 JP102.11
  Bottom 0.61: JP102.11 IC101.6
P7
  Top 0.61: IC1.1 JP3.16
  Bottom 0.61: JP3.16 IC1.1
P7_RTS
  Top 0.61: JP101.B1 JP101.A1 23.51,55.83 24.78,57.1 IC101.7 JP102.10
  Bottom 0.61: JP102.10 24.78,57.1 23.51,55.83 23.51,49.48 28.59,49.48
P7_RTS1
  Top 0.61: JP4.B1 JP4.A1 53.99,55.83 55.26,57.1 IC1.7 JP3.10
  Bottom 0.61: JP3.10 55.26,57.1 53.99,55.83 53.99,49.48 59.07,49.48
P7_RTS2
  Top 0.61: JP7.B1 JP7.A1 84.47,55.83 85.74,57.1 IC2.7 JP6.10
  Bottom 0.61: JP6.10 85.74,57.1 84.47,55.83 84.47,49.48 89.55,49.48
P7_RTS3
  Top 0.61: JP10.B1 JP10.A1 114.95,55.83 116.22,57.1 IC3.7 JP9.10
  Bottom 0.61: JP9.10 116.22,57.1 114.95,55.83 114.95,49.48 120.03,49.48
P7_RTS4
  Top 0.61: JP13.B1 JP13.A1 145.43,55.83 146.7,57.1 IC4.7 JP12.10
  Bottom 0.61: JP12.10 146.7,57.1 145.43,55.83 145.43,49.48 150.51,49.48
P8
  Top 0.61: IC101.8 JP102.9
  Bottom 0.61: JP102.9 IC101.8
P9
  Top 0.61: JP102.8 IC101.9
  Bottom 0.61: IC101.9 JP102.8
P10
  Top 0.61: JP102.7 IC101.10
  Bottom 0.61: IC101.10 JP102.7
P11
  Top 0.61: JP102.6 IC101.11
  Bottom 0.61: IC101.11 JP102.6
P12
  Top 0.61: JP102.5 IC101.12
  Bottom 0.61: IC101.12 JP102.5
P13
  Top 0.61: JP102.4 IC101.13
  Bottom 0.61: IC101.13 JP102.4
P14
  Top 0.61: JP102.3 IC101.14
  Bottom 0.61: IC101.14 JP102.3
P15
  Top 0.61: IC1.2 JP3.15
  Bottom 0.61: IC1.2 JP3.15
P16
  Top 0.61: IC1.3 JP3.14
  Bottom 0.61: IC1.3 JP3.14
P17
  Top 0.61: IC1.4 JP3.13
  Bottom 0.61: JP3.13 IC1.4
P18
  Top 0.61: IC1.5 JP3.12
  Bottom 0.61: IC1.5 JP3.12
P19
  Top 0.61: IC1.6 JP3.11
  Bottom 0.61: JP3.11 IC1.6
P20
  Top 0.61: IC1.8 JP3.9
  Bottom 0.61: JP3.9 IC1.8
P21
  Top 0.61: JP3.8 IC1.9
  Bottom 0.61: IC1.9 JP3.8
P22
  Top 0.61: JP3.7 IC1.10
  Bottom 0.61: IC1.10 JP3.7
P23
  Top 0.61: JP3.6 IC1.11
  Bottom 0.61: IC1.11 JP3.6
P24
  Top 0.61: JP3.5 IC1.12
  Bottom 0.61: IC1.12 JP3.5
P25
  Top 0.61: JP3.4 IC1.13
  Bottom 0.61: IC1.13 JP3.4
P26
  Top 0.61: JP3.3 IC1.14
  Bottom 0.61: IC1.14 JP3.3
P27
  Top 0.61: IC2.1 JP6.16
  Bottom 0.61: JP6.16 IC2.1
P28
  Top 0.61: IC2.2 JP6.15
  Bottom 0.61: IC2.2 JP6.15
P29
  Top 0.61: IC2.3 JP6.14
  Bottom 0.61: IC2.3 JP6.14
P30
  Top 0.61: IC2.4 JP6.13
  Bottom 0.61: JP6.13 IC2.4
P31
  Top 0.61: IC2.5 JP6.12
  Bottom 0.61: IC2.5 JP6.12
P32
  Top 0.61: IC2.6 JP6.11
  Bottom 0.61: JP6.11 IC2.6
P33
  Top 0.61: IC2.8 JP6.9
  Bottom 0.61: JP6.9 IC2.8
P34
  Top 0.61: JP6.8 IC2.9
  Bottom 0.61: IC2.9 JP6.8
P35
  Top 0.61: JP6.7 IC2.10
  Bottom 0.61: IC2.10 JP6.7
P36
  Top 0.61: JP6.6 IC2.11
  Bottom 0.61: IC2.11 JP6.6
P37
  Top 0.61: JP6.5 IC2.12
  Bottom 0.61: IC2.12 JP6.5
P38
  Top 0.61: JP6.4 IC2.13
  Bottom 0.61: IC2.13 JP6.4
P39
  Top 0.61: JP6.3 IC2.14
  Bottom 0.61: IC2.14 JP6.3
P40
  Top 0.61: IC3.1 JP9.16
  Bottom 0.61: JP9.16 IC3.1
P41
  Top 0.61: IC3.2 JP9.15
  Bottom 0.61: IC3.2 JP9.15
P42
  Top 0.61: IC3.3 JP9.14
  Bottom 0.61: IC3.3 JP9.14
P43
  Top 0.61: IC3.4 JP9.13
  Bottom 0.61: JP9.13 IC3.4
P44
  Top 0.61: IC3.5 JP9.12
  Bottom 0.61: IC3.5 JP9.12
P45
  Top 0.61: IC3.6 JP9.11
  Bottom 0.61: JP9.11 IC3.6
P46
  Top 0.61: IC3.8 JP9.9
  Bottom 0.61: JP9.9 IC3.8
P47
  Top 0.61: JP9.8 IC3.9
  Bottom 0.61: IC3.9 JP9.8
P48
  Top 0.61: JP9.7 IC3.10
  Bottom 0.61: IC3.10 JP9.7
P49
  Top 0.61: JP9.6 IC3.11
  Bottom 0.61: IC3.11 JP9.6
P50
  Top 0.61: JP9.5 IC3.12
  Bottom 0.61: IC3.12 JP9.5
P51
  Top 0.61: JP9.4 IC3.13
  Bottom 0.61: IC3.13 JP9.4
P52
  Top 0.61: JP9.3 IC3.14
  Bottom 0.61: IC3.14 JP9.3
P53
  Top 0.61: IC4.1 JP12.16
  Bottom 0.61: JP12.16 IC4.1
P54
  Top 0.61: IC4.2 JP12.15
  Bottom 0.61: IC4.2 JP12.15
P55
  Top 0.61: IC4.3 JP12.14
  Bottom 0.61: IC4.3 JP12.14
P56
  Top 0.61: IC4.4 JP12.13
  Bottom 0.61: JP12.13 IC4.4
P57
  Top 0.61: IC4.5 JP12.12
  Bottom 0.61: IC4.5 JP12.12
P58
  Top 0.61: IC4.6 JP12.11
  Bottom 0.61: JP12.11 IC4.6
P59
  Top 0.61: IC4.8 JP12.9
  Bottom 0.61: JP12.9 IC4.8
P60
  Top 0.61: JP12.8 IC4.9
  Bottom 0.61: IC4.9 JP12.8
P61
  Top 0.61: JP12.7 IC4.10
  Bottom 0.61: IC4.10 JP12.7
P62
  Top 0.61: JP12.6 IC4.11
  Bottom 0.61: IC4.11 JP12.6
P63
  Top 0.61: JP12.5 IC4.12
  Bottom 0.61: IC4.12 JP12.5
P64
  Top 0.61: JP12.4 IC4.13
  Bottom 0.61: IC4.13 JP12.4
P65
  Top 0.61: JP12.3 IC4.14
  Bottom 0.61: IC4.14 JP12.3
RC_RTS  (via drill 1)
  Top 0.406: 23.5,38.1 v23.5,40.64 24.77,41.91 PAD10.1
  Top 0.61: 23.5,38.1 D1.ANODE
  Bottom 0.406: PAD7.1 17.14,40.64 v23.5,40.64
RC_RTS1  (via drill 1)
  Top 0.406: 53.98,38.1 v53.98,40.64 55.24,41.91 PAD20.1
  Top 0.61: 53.98,38.1 D2.ANODE
  Bottom 0.406: PAD17.1 47.62,40.64 v53.98,40.64
RC_RTS2  (via drill 1)
  Top 0.406: 84.45,38.1 v84.45,40.64 85.72,41.91 PAD30.1
  Top 0.61: 84.45,38.1 D3.ANODE
  Bottom 0.406: PAD27.1 78.11,40.64 v84.45,40.64
RC_RTS3  (via drill 1)
  Top 0.406: 114.94,38.1 v114.94,40.64 116.2,41.91 PAD40.1
  Top 0.61: 114.94,38.1 D4.ANODE
  Bottom 0.406: PAD37.1 108.58,40.64 v114.94,40.64
RC_RTS4  (via drill 1)
  Top 0.406: 145.41,38.1 v145.41,40.64 146.69,41.91 PAD50.1
  Top 0.61: 145.41,38.1 D5.ANODE
  Bottom 0.406: PAD47.1 139.06,40.64 v145.41,40.64
RC_RX
  Top 0.406: PAD2.1 18.41,40.64 21.27,40.64 22.23,39.69 22.23,37.15 24.77,34.61 R5.1
RC_RX1
  Top 0.406: PAD12.1 48.9,40.64 51.75,40.64 52.7,39.69 52.7,37.15 55.24,34.61 R10.1
RC_RX2
  Top 0.406: PAD22.1 79.38,40.64 82.23,40.64 83.19,39.69 83.19,37.15 85.72,34.61 R16.1
RC_RX3
  Top 0.406: PAD32.1 109.86,40.64 112.71,40.64 113.67,39.69 113.67,37.15 116.2,34.61 R22.1
RC_RX4
  Top 0.406: PAD42.1 140.34,40.64 143.19,40.64 144.15,39.69 144.15,37.15 146.69,34.61 R28.1
RX_TX
  Top 0.406: OK_TX.4 R6.1 10.79,31.75 7.94,31.75 7.94,35.88 9.21,37.15 9.84,37.15 PAD3.1
RX_TX1
  Top 0.406: OK_TX1.4 R12.1 41.27,31.75 38.42,31.75 38.42,35.88 39.69,37.15 40.32,37.15 PAD13.1
RX_TX2
  Top 0.406: OK_TX2.4 R18.1 71.75,31.75 68.9,31.75 68.9,35.88 70.17,37.15 70.8,37.15 PAD23.1
RX_TX3
  Top 0.406: OK_TX3.4 R24.1 102.23,31.75 99.38,31.75 99.38,35.88 100.65,37.15 101.28,37.15 PAD33.1
RX_TX4
  Top 0.406: OK_TX4.4 R30.1 132.72,31.75 129.86,31.75 129.86,35.88 131.13,37.15 131.76,37.15 PAD43.1
V+
  Top 0.406: 18.73,38.1 D1.KATHODE | 15.88,29.53 15.56,29.53 12.06,33.34 12.06,34.29 10.79,34.29 R6.2 | 18.73,38.1 18.73,32.07 16.19,29.53 15.88,29.53 | 18.73,38.1 C3.1 | 15.88,29.53 C4.+
V+1
  Top 0.406: 49.21,38.1 D2.KATHODE | 46.35,29.53 46.04,29.53 42.55,33.34 42.55,34.29 41.27,34.29 R12.2 | 49.21,38.1 49.21,32.07 46.67,29.53 46.35,29.53 | 49.21,38.1 C6.1 | 46.35,29.53 C7.+
V+2
  Top 0.406: 79.69,38.1 D3.KATHODE | 76.83,29.53 76.52,29.53 73.03,33.34 73.03,34.29 71.75,34.29 R18.2 | 79.69,38.1 79.69,32.07 77.15,29.53 76.83,29.53 | 79.69,38.1 C12.1 | 76.83,29.53 C13.+
V+3
  Top 0.406: 110.17,38.1 D4.KATHODE | 107.31,29.53 107,29.53 103.5,33.34 103.5,34.29 102.23,34.29 R24.2 | 110.17,38.1 110.17,32.07 107.63,29.53 107.31,29.53 | 110.17,38.1 C18.1 | 107.31,29.53 C19.+
V+4
  Top 0.406: 140.65,38.1 D5.KATHODE | 137.79,29.53 137.48,29.53 133.99,33.34 133.99,34.29 132.72,34.29 R30.2 | 140.65,38.1 140.65,32.07 138.11,29.53 137.79,29.53 | 140.65,38.1 C24.1 | 137.79,29.53 C25.+

## Text on the board
Top: TOP
tPlace: GNDIO / / TX / RX | GNDIO / / TX / RX | GNDIO / / TX / RX | GNDIO / / TX / RX | GNDIO / / TX / RX | GND / +3V3 / / IO2 / IO3 / / / IO6 / IO7 | GND / +3V3 / / IO2 / IO3 / / / IO6 / IO7 | GND / +3V3 / / IO2 / IO3 / / / IO6 / IO7 | GND / +3V3 / / IO2 / IO3 / / / IO6 / IO7 | GND / +3V3 / / IO2 / IO3 / / / IO6 / IO7